# Altium PCB PCB_MEZ.PcbDoc
Units mm, origin at the board's own origin, x right, y up, seen from the top; angles counter-clockwise.
Board outline 77.5 x 123 mm, 2 copper layers (Top Layer, Bottom Layer); 9 components, 87 nets, 356 pads, 0 vias.
Unrouted connection lines stored in the file: 6.
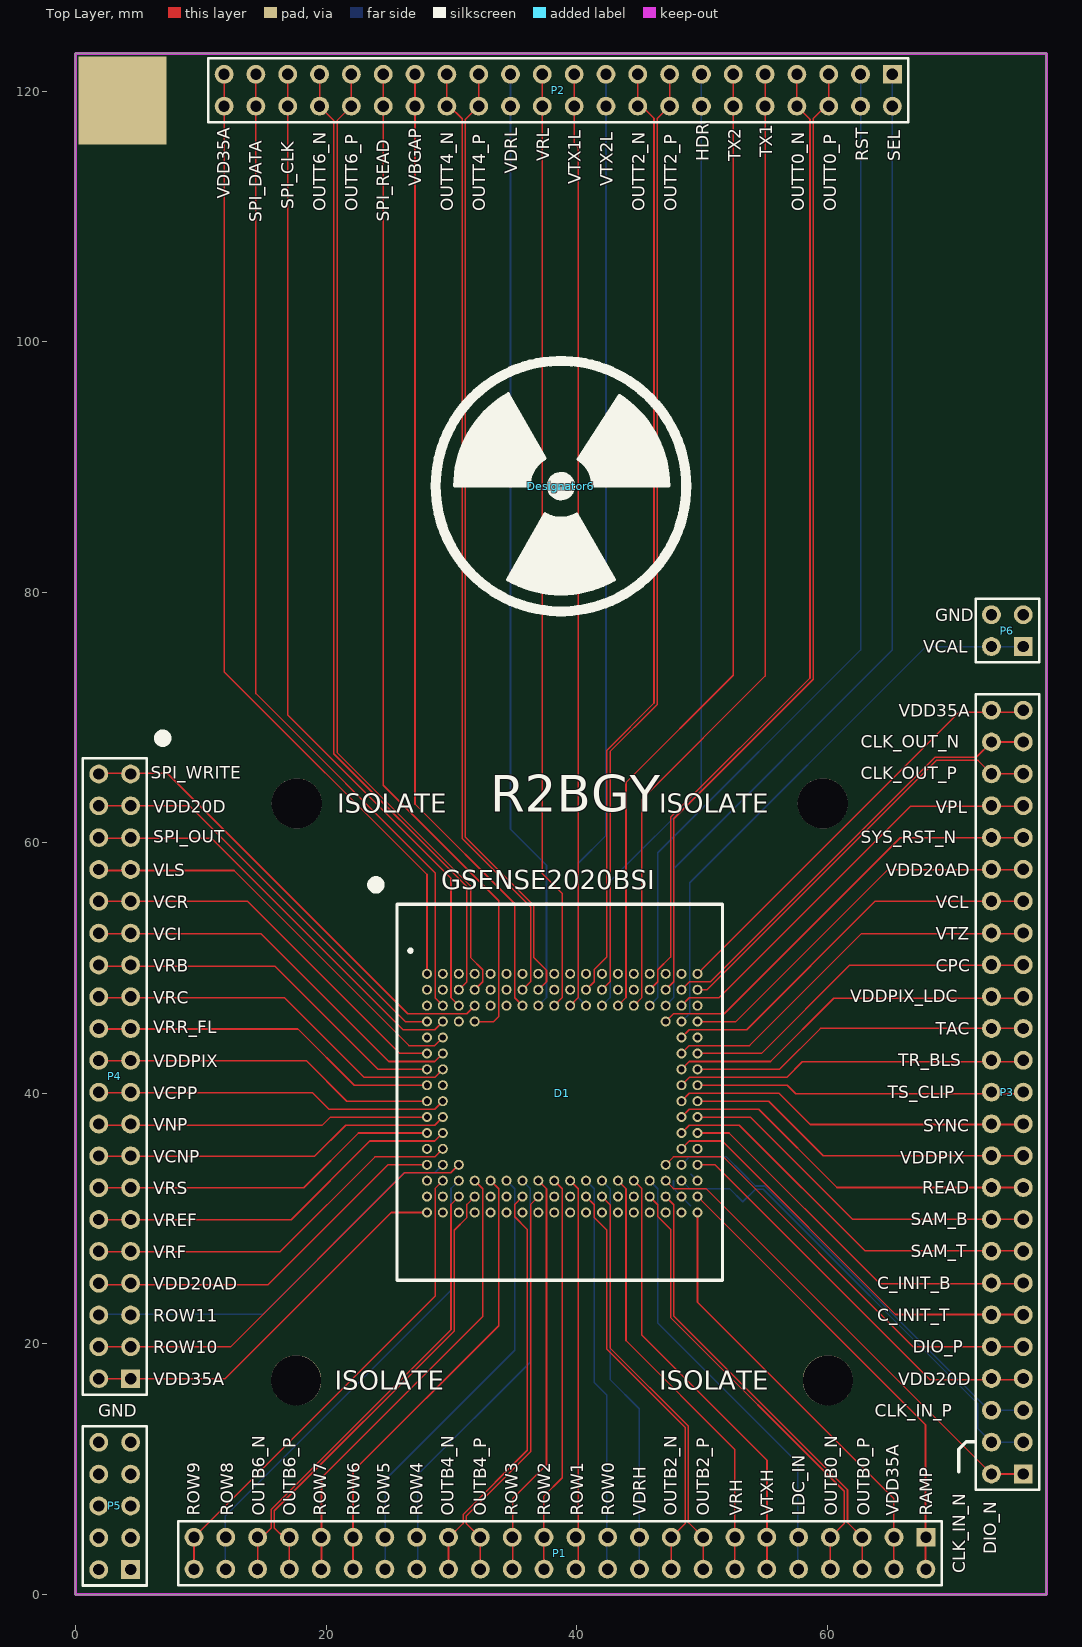
[diagram p0: Top Layer view]
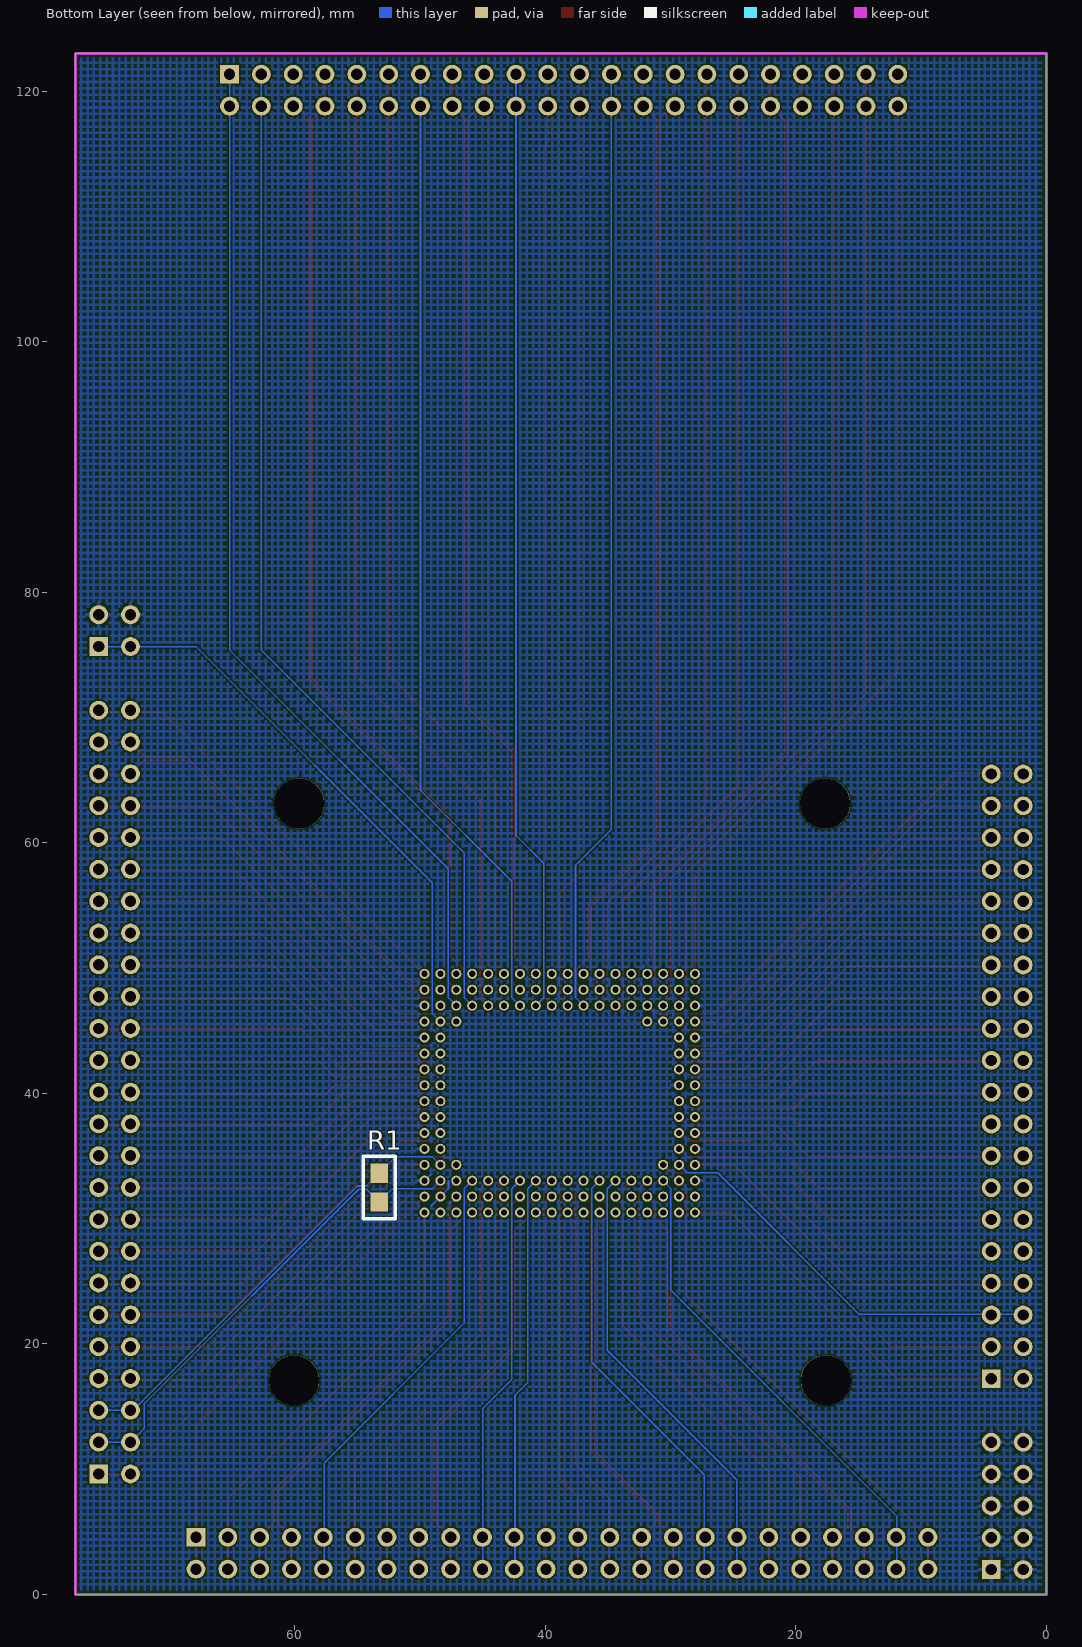
[diagram p1: Bottom Layer view, seen from below]

## Layer stack, top to bottom
Top Solder: solder mask 0.0102, Solder Resist, Dk 3.5
Top Layer: signal copper 0.0356
Dielectric 1: dielectric 0.32, FR-4, Dk 4.8
Bottom Layer: signal copper 0.0356
Bottom Solder: solder mask 0.0102, Solder Resist, Dk 3.5

## Board outline
0,0 77.5,0 77.5,123 0,123

## Design rules (kind name [scope] priority, off if disabled: settings)
Clearance [All] p1: gap=0.125
DiffPairsRouting [All] p1: maxlimit=0.254 minlimit=0.127 mostfreqgap=0.127 toplayer_minwidth=0.127 toplayer_maxwidth=0.381 toplayer_prefwidth=0.127 bottomlayer_minwidth=0.127 bottomlayer_maxwidth=0.381 bottomlayer_prefwidth=0.127 maxuncoupledlength=12.7
PolygonConnect [All] p1: connectstyle=Relief reliefconductorwidth=0.254 reliefentries=4 polygonreliefangle="90 Angle" airgapwidth=0.254
RoutingVias [All] p1: holewidth=0.711 width=1.27 viastyle="Through Hole" minholewidth=0.711 minwidth=1.27 maxholewidth=0.711 maxwidth=1.27
SolderMaskExpansion [All] p1: expansion=0.102
Width [All] p1: maxlimit=0.254 minlimit=0.127 preferedwidth=0.127
28 further rules are at their usual default settings.

## Classes and differential pairs
component class Sheet_MEZ: D1 P1 P2 P3 P4 P5 P6 R1
differential pair CLK_IN: +CLK_IN_P -CLK_IN_N
differential pair CLK_OUT: +CLK_OUT_P -CLK_OUT_N
differential pair OUTB0: +OUTB0_P -OUTB0_N
differential pair OUTB2: +OUTB2_P -OUTB2_N
differential pair OUTB4: +OUTB4_P -OUTB4_N
differential pair OUTB6: +OUTB6_P -OUTB6_N
differential pair OUTT0: +OUTT0_P -OUTT0_N
differential pair OUTT2: +OUTT2_P -OUTT2_N
differential pair OUTT4: +OUTT4_P -OUTT4_N
differential pair OUTT6: +OUTT6_P -OUTT6_N

## Components (designator, comment, footprint, x,y, rotation, side; value= is the part's Value field where it differs from the comment)
D1 "GSENSE2020BSI" GSENSE2020BSI 28.054,49.54 r0 top
Designator6 "Comment" RADIATION 38.75,88.468 r0 top
P1 "Header 24X2" HDR2X24 67.877,4.568 r180 top
P2 "Header 22X2" HDR2X22 65.202,121.336 r180 top
P3 "Header 25X2" HDR2X25 75.649,9.622 r90 top
P4 "Header 20X2" HDR2X20 4.402,17.23 r90 top
P5 "Header 5X2" HDR2X5 4.402,1.99 r90 top
P6 "Header 2X2" HDR2X2 75.649,75.662 r90 top
R1 "100" RES 54.5,30 r180 bottom

## Footprints (in the part's own frame and the unit in brackets; to place one, negate y for a bottom-side part, rotate by r counter-clockwise, add the part's x,y. Pads: shape width x height; smd on the part's side, far side on the other; paste and mask are expansions set on the pad)
GSENSE2020BSI [mm]
  round 0.8 hole 0.5: A1(0,0) A2(1.27,0) A3(2.54,0) A4(3.81,0) A5(5.08,0) A6(6.35,0) A7(7.62,0) A8(8.89,0) A9(10.16,0) A10(11.43,0) A11(12.7,0) A12(13.97,0) A13(15.24,0) A14(16.51,0) A15(17.78,0) A16(19.05,0) A17(20.32,0) A18(21.59,0) B1(0,-1.27) B2(1.27,-1.27) B3(2.54,-1.27) B4(3.81,-1.27) B5(5.08,-1.27) B6(6.35,-1.27) B7(7.62,-1.27) B8(8.89,-1.27) B9(10.16,-1.27) B10(11.43,-1.27) B11(12.7,-1.27) B12(13.97,-1.27) B13(15.24,-1.27) B14(16.51,-1.27) B15(17.78,-1.27) B16(19.05,-1.27) B17(20.32,-1.27) B18(21.59,-1.27) C1(0,-2.54) C2(1.27,-2.54) C3(2.54,-2.54) C4(3.81,-2.54) C5(5.08,-2.54) C6(6.35,-2.54) C7(7.62,-2.54) C8(8.89,-2.54) C9(10.16,-2.54) C10(11.43,-2.54) C11(12.7,-2.54) C12(13.97,-2.54) C13(15.24,-2.54) C14(16.51,-2.54) C15(17.78,-2.54) C16(19.05,-2.54) C17(20.32,-2.54) C18(21.59,-2.54) D1(0,-3.81) D2(1.27,-3.81) D3(2.54,-3.81) D4(3.81,-3.81) D16(19.05,-3.81) D17(20.32,-3.81) D18(21.59,-3.81) E1(0,-5.08) E2(1.27,-5.08) E17(20.32,-5.08) E18(21.59,-5.08) F1(0,-6.35) F2(1.27,-6.35) F17(20.32,-6.35) F18(21.59,-6.35) G1(0,-7.62) G2(1.27,-7.62) G17(20.32,-7.62) G18(21.59,-7.62) H1(0,-8.89) H2(1.27,-8.89) H17(20.32,-8.89) H18(21.59,-8.89) J1(0,-10.16) J2(1.27,-10.16) J17(20.32,-10.16) J18(21.59,-10.16) K1(0,-11.43) K2(1.27,-11.43) K17(20.32,-11.43) K18(21.59,-11.43) L1(0,-12.7) L2(1.27,-12.7) L17(20.32,-12.7) L18(21.59,-12.7) M1(0,-13.97) M2(1.27,-13.97) M17(20.32,-13.97) M18(21.59,-13.97) N1(0,-15.24) N2(1.27,-15.24) N3(2.54,-15.24) N16(19.05,-15.24) N17(20.32,-15.24) N18(21.59,-15.24) P1(0,-16.51) P2(1.27,-16.51) P3(2.54,-16.51) P4(3.81,-16.51) P5(5.08,-16.51) P6(6.35,-16.51) P7(7.62,-16.51) P8(8.89,-16.51) P9(10.16,-16.51) P10(11.43,-16.51) P11(12.7,-16.51) P12(13.97,-16.51) P13(15.24,-16.51) P14(16.51,-16.51) P15(17.78,-16.51) P16(19.05,-16.51) P17(20.32,-16.51) P18(21.59,-16.51) R1(0,-17.78) R2(1.27,-17.78) R3(2.54,-17.78) R4(3.81,-17.78) R5(5.08,-17.78) R6(6.35,-17.78) R7(7.62,-17.78) R8(8.89,-17.78) R9(10.16,-17.78) R10(11.43,-17.78) R11(12.7,-17.78) R12(13.97,-17.78) R13(15.24,-17.78) R14(16.51,-17.78) R15(17.78,-17.78) R16(19.05,-17.78) R17(20.32,-17.78) R18(21.59,-17.78) T1(0,-19.05) T2(1.27,-19.05) T3(2.54,-19.05) T4(3.81,-19.05) T5(5.08,-19.05) T6(6.35,-19.05) T7(7.62,-19.05) T8(8.89,-19.05) T9(10.16,-19.05) T10(11.43,-19.05) T11(12.7,-19.05) T12(13.97,-19.05) T13(15.24,-19.05) T14(16.51,-19.05) T15(17.78,-19.05) T16(19.05,-19.05) T17(20.32,-19.05) T18(21.59,-19.05)
  silkscreen extent -2.4,-24.45 23.6,5.55
HDR2X2 [mm] "Connector; Header; 2x2 Position"
  rect 1.5x1.5 hole 0.9: 1(0,0)
  round 1.5 hole 0.9: 2(0,2.54) 3(2.54,0) 4(2.54,2.54)
  silkscreen extent -1.27,-1.27 3.81,3.81
HDR2X5 [mm] "Connector; Header; 5x2 Position"
  rect 1.5x1.5 hole 0.9: 1(0,0)
  round 1.5 hole 0.9: 2(0,2.54) 3(2.54,0) 4(2.54,2.54) 5(5.08,0) 6(5.08,2.54) 7(7.62,0) 8(7.62,2.54) 9(10.16,0) 10(10.16,2.54)
  silkscreen extent -1.27,-1.27 11.43,3.81
HDR2X20 [mm] "Connector; Header; 20x2 Position"
  rect 1.5x1.5 hole 0.9: 1(0,0)
  round 1.5 hole 0.9: 2(0,2.54) 3(2.54,0) 4(2.54,2.54) 5(5.08,0) 6(5.08,2.54) 7(7.62,0) 8(7.62,2.54) 9(10.16,0) 10(10.16,2.54) 11(12.7,0) 12(12.7,2.54) 13(15.24,0) 14(15.24,2.54) 15(17.78,0) 16(17.78,2.54) 17(20.32,0) 18(20.32,2.54) 19(22.86,0) 20(22.86,2.54) 21(25.4,0) 22(25.4,2.54) 23(27.94,0) 24(27.94,2.54) 25(30.48,0) 26(30.48,2.54) 27(33.02,0) 28(33.02,2.54) 29(35.56,0) 30(35.56,2.54) 31(38.1,0) 32(38.1,2.54) 33(40.64,0) 34(40.64,2.54) 35(43.18,0) 36(43.18,2.54) 37(45.72,0) 38(45.72,2.54) 39(48.26,0) 40(48.26,2.54)
  silkscreen extent -1.27,-1.27 49.53,3.81
HDR2X22 [mm] "Connector; Header; 22x2 Position"
  rect 1.5x1.5 hole 0.9: 1(0,0)
  round 1.5 hole 0.9: 2(0,2.54) 3(2.54,0) 4(2.54,2.54) 5(5.08,0) 6(5.08,2.54) 7(7.62,0) 8(7.62,2.54) 9(10.16,0) 10(10.16,2.54) 11(12.7,0) 12(12.7,2.54) 13(15.24,0) 14(15.24,2.54) 15(17.78,0) 16(17.78,2.54) 17(20.32,0) 18(20.32,2.54) 19(22.86,0) 20(22.86,2.54) 21(25.4,0) 22(25.4,2.54) 23(27.94,0) 24(27.94,2.54) 25(30.48,0) 26(30.48,2.54) 27(33.02,0) 28(33.02,2.54) 29(35.56,0) 30(35.56,2.54) 31(38.1,0) 32(38.1,2.54) 33(40.64,0) 34(40.64,2.54) 35(43.18,0) 36(43.18,2.54) 37(45.72,0) 38(45.72,2.54) 39(48.26,0) 40(48.26,2.54) 41(50.8,0) 42(50.8,2.54) 43(53.34,0) 44(53.34,2.54)
  silkscreen extent -1.27,-1.27 54.61,3.81
HDR2X24 [mm] "Connector; Header; 24x2 Position"
  rect 1.5x1.5 hole 0.9: 1(0,0)
  round 1.5 hole 0.9: 2(0,2.54) 3(2.54,0) 4(2.54,2.54) 5(5.08,0) 6(5.08,2.54) 7(7.62,0) 8(7.62,2.54) 9(10.16,0) 10(10.16,2.54) 11(12.7,0) 12(12.7,2.54) 13(15.24,0) 14(15.24,2.54) 15(17.78,0) 16(17.78,2.54) 17(20.32,0) 18(20.32,2.54) 19(22.86,0) 20(22.86,2.54) 21(25.4,0) 22(25.4,2.54) 23(27.94,0) 24(27.94,2.54) 25(30.48,0) 26(30.48,2.54) 27(33.02,0) 28(33.02,2.54) 29(35.56,0) 30(35.56,2.54) 31(38.1,0) 32(38.1,2.54) 33(40.64,0) 34(40.64,2.54) 35(43.18,0) 36(43.18,2.54) 37(45.72,0) 38(45.72,2.54) 39(48.26,0) 40(48.26,2.54) 41(50.8,0) 42(50.8,2.54) 43(53.34,0) 44(53.34,2.54) 45(55.88,0) 46(55.88,2.54) 47(58.42,0) 48(58.42,2.54)
  silkscreen extent -1.27,-1.27 59.69,3.81
HDR2X25 [mm] "Connector; Header; 25x2 Position"
  rect 1.5x1.5 hole 0.9: 1(0,0)
  round 1.5 hole 0.9: 2(0,2.54) 3(2.54,0) 4(2.54,2.54) 5(5.08,0) 6(5.08,2.54) 7(7.62,0) 8(7.62,2.54) 9(10.16,0) 10(10.16,2.54) 11(12.7,0) 12(12.7,2.54) 13(15.24,0) 14(15.24,2.54) 15(17.78,0) 16(17.78,2.54) 17(20.32,0) 18(20.32,2.54) 19(22.86,0) 20(22.86,2.54) 21(25.4,0) 22(25.4,2.54) 23(27.94,0) 24(27.94,2.54) 25(30.48,0) 26(30.48,2.54) 27(33.02,0) 28(33.02,2.54) 29(35.56,0) 30(35.56,2.54) 31(38.1,0) 32(38.1,2.54) 33(40.64,0) 34(40.64,2.54) 35(43.18,0) 36(43.18,2.54) 37(45.72,0) 38(45.72,2.54) 39(48.26,0) 40(48.26,2.54) 41(50.8,0) 42(50.8,2.54) 43(53.34,0) 44(53.34,2.54) 45(55.88,0) 46(55.88,2.54) 47(58.42,0) 48(58.42,2.54) 49(60.96,0) 50(60.96,2.54)
  silkscreen extent -1.27,-1.27 62.23,3.81
RADIATION [mm]
  silkscreen extent -10,-10 10,10
RES [mil] "FROM_MAX"
  rect 55.98x60 smd: 1(49,52.71) 2(49,142.71)
  silkscreen extent -1,0 99,196, body extent 17,19 81,177, height 100

## Part data
P1: "Header, 24-Pin, Dual row"
P2: "Header, 22-Pin, Dual row"
P3: "Header, 25-Pin, Dual row"
P4: "Header, 20-Pin, Dual row"
P5: "Header, 5-Pin, Dual row"
P6: "Header, 2-Pin, Dual row"
R1: library part Res, "Resistor"

## Free pads (board coordinates)
  rect 7x7 smd: 0(3.759,119.253)
  round 4 hole 4: 0(17.61,17.09) 0(17.661,63.14) 0(59.647,63.14) 0(60.053,17.09)

## Nets (pads, with @x,y where several pads share a name; then routed paths per layer and width w, separated by ;. In a path a pad name is that pad's centre, name@x,y a point inside that pad or via, vN(x,y) a via of type N, cw(c..) or ccw(c..) an arc to the next point about the centre after c; other vN are vias at no path point)
C_INIT_B: D1.L18 P3.13 P3.14 | length 31
  Top Layer w0.127: D1.L18 52.162,36.84 64.186,24.816 75.602,24.816 P3.13
C_INIT_T: D1.M17 P3.11 P3.12 | length 33.3
  Top Layer w0.127: D1.M17 48.999,36.195 51.613,36.195 65.456,22.352 75.619,22.352 P3.11
CLK_IN_N: D1.P17 P3.3 P3.4 R1.1 | length 37.9
  Bottom Layer w0.127: D1.P17 49.004,32.4 52.194,32.4 R1.1 54.271,32.355 54.9,32.355 72,15.255 72,13.271 P3.4 P3.3
CLK_IN_P: D1.N17 P3.5 P3.6 R1.2 | length 35.9
  Bottom Layer w0.127: D1.N17 48.999,34.925 51.955,34.925 R1.2 54.271,32.609 55.005,32.609 72.912,14.702 P3.6 P3.5
CLK_OUT_N: D1.B17 P3.47 P3.48 | length 35.5
  Top Layer w0.127: D1.B17 48.999,48.895 50.673,48.895 68.605,66.827 71.894,66.827 P3.48 P3.47
CLK_OUT_P: D1.B18 P3.45 P3.46 | length 34
  Top Layer w0.127: D1.B18 50.407,48.27 68.711,66.573 72.038,66.573 P3.46 P3.45
CPC: D1.F18 P3.33 P3.34 | length 28.9
  Top Layer w0.127: D1.F18 54.747,43.19 61.798,50.241 75.628,50.241 P3.33
DIO_N: D1.P16 P3.1 P3.2 | length 38.5
  Top Layer w0.127: D1.P16 47.734,32.4 50.331,32.4 P3.2 P3.1
  Bottom Layer w0.127: P3.2@72.851,9.622 P3.2
DIO_P: D1.N16 P3.9 P3.10 | length 35.1
  Top Layer w0.127: D1.N16 47.729,34.925 51.714,34.925 66.878,19.761 75.628,19.761 P3.9
GND: D1.C1 D1.C18 D1.E1 D1.E18 D1.H2 D1.M1 D1.M18 D1.P1 D1.P18 D1.R17 P5.1 P5.2 P5.3 P5.4 P5.5 P5.6 P5.7 P5.8 P5.9 P5.10 P6.3 P6.4 | length 3.3
  Bottom Layer w0.127: 47.731,33.03 47.731,32.403 D1.R17 49.094,31.039 ; 49.106,33.56 49.637,33.03 D1.P18
HDR: D1.C12 P2.13 P2.14 | length 77.6
  Bottom Layer w0.127: D1.C12 42.672,47.648 42.672,56.921 49.962,64.211 P2.14 P2.13
LDC_IN: D1.P15 P1.9 P1.10 | length 35.9
  Bottom Layer w0.127: D1.P15 46.482,32.382 46.482,21.666 57.633,10.516 57.633,2.112 P1.10
OUTB0_N: D1.R15 P1.7 P1.8 | length 36.6
  Top Layer w0.127: D1.R15 46.482,31.112 46.482,30.175 47.498,29.159 47.498,22.12 61.366,8.251 61.366,5.678 P1.7 P1.8
OUTB0_P: D1.R16 P1.5 P1.6 | length 36.2
  Top Layer w0.127: D1.R16 47.752,31.112 47.752,22.225 61.62,8.357 61.62,5.744 P1.5 P1.6
OUTB2_N: D1.R11 P1.17 P1.18 | length 33.5
  Top Layer w0.127: D1.R11 41.402,31.112 41.402,30.099 42.418,29.083 42.418,19.58 48.666,13.331 48.666,5.678 P1.17 P1.18
OUTB2_P: D1.R12 P1.15 P1.16 | length 33.1
  Top Layer w0.127: D1.R12 42.672,31.112 42.672,19.685 48.92,13.437 48.92,5.744 P1.15 P1.16
OUTB4_N: D1.R7 P1.31 P1.32 | length 33.1
  Top Layer w0.127: P1.32 P1.31 29.841,4.568 30.937,5.664 30.937,6.375 36.068,11.506 36.068,29.134 35.052,30.15 35.052,31.138 D1.R7
OUTB4_P: D1.R8 P1.29 P1.30 | length 32.6
  Top Layer w0.127: P1.30 P1.29 32.288,4.568 31.191,5.664 31.191,6.27 36.322,11.401 36.322,31.138 D1.R8
OUTB6_N: D1.R3 P1.43 P1.44 | length 36.6
  Top Layer w0.127: P1.44 P1.43 14.88,4.568 15.621,5.309 15.621,6.782 29.972,21.133 29.972,31.138 D1.R3
OUTB6_P: D1.R4 P1.41 P1.42 | length 37.1
  Top Layer w0.127: P1.42 P1.41 16.616,4.568 15.875,5.309 15.875,6.677 30.234,21.035 30.234,29.079 31.242,30.087 31.242,31.138 D1.R4
OUTT0_N: D1.B15 P2.7 P2.8 | length 78.8
  Top Layer w0.127: D1.B15 46.482,48.918 46.482,49.86 47.498,50.876 47.498,62.03 58.623,73.156 58.623,117.754 P2.8 P2.7
OUTT0_P: D1.B16 P2.5 P2.6 | length 78.6
  Top Layer w0.127: D1.B16 47.752,48.918 47.752,61.925 58.877,73.05 58.877,117.805 59.868,118.796 P2.6 P2.5
OUTT2_N: D1.B11 P2.17 P2.18 | length 76
  Top Layer w0.127: D1.B11 41.402,48.918 41.402,49.886 42.418,50.902 42.418,67.39 46.177,71.149 46.177,117.831 45.212,118.796 P2.18 P2.17
OUTT2_P: D1.B12 P2.15 P2.16 | length 75.3
  Top Layer w0.127: D1.B12 42.672,48.918 42.672,67.285 46.431,71.044 46.431,117.805 P2.16 P2.15
OUTT4_N: D1.B7 P2.29 P2.30 | length 76.2
  Top Layer w0.127: P2.29 P2.30 29.845,118.796 30.861,117.78 30.861,60.35 36.322,54.889 36.322,48.918 D1.B7
OUTT4_P: D1.B8 P2.27 P2.28 | length 76.5
  Top Layer w0.127: P2.27 P2.28 31.115,117.729 31.115,60.456 36.576,54.995 36.576,50.851 37.592,49.835 37.592,48.918 D1.B8
OUTT6_N: D1.B3 P2.37 P2.38 | length 78.2
  Top Layer w0.127: P2.37 P2.38 20.625,117.653 20.625,67.107 31.242,56.49 31.242,48.918 D1.B3
OUTT6_P: D1.B4 P2.35 P2.36 | length 78.6
  Top Layer w0.127: P2.35 P2.36 20.879,117.653 20.879,67.212 31.534,56.557 31.534,50.838 32.512,49.86 32.512,48.918 D1.B4
RAMP: D1.R18 P1.1 P1.2 | length 37.3
  Top Layer w0.127: D1.R18 67.843,13.56 67.843,2.061 P1.2
READ: D1.K17 P3.19 P3.20 | length 30.1
  Top Layer w0.127: D1.K17 48.999,38.735 54.534,38.735 60.782,32.487 75.645,32.487 P3.19
ROW0: D1.P11 P1.21 P1.22 | length 31.7
  Bottom Layer w0.127: D1.P11 41.402,32.382 41.402,16.916 42.418,15.9 42.418,2.086 P1.22
ROW1: D1.P10 P1.23 P1.24 | length 31.4
  Top Layer w0.127: D1.P10 40.132,32.382 40.132,2.223 P1.24
ROW2: D1.P9 P1.25 P1.26 | length 31.9
  Top Layer w0.127: P1.26 37.363,2.061 37.363,7.823 38.862,9.322 38.862,32.382 D1.P9
ROW3: D1.P8 P1.27 P1.28 | length 32.4
  Top Layer w0.127: P1.28 34.9,2.071 34.9,7.671 37.592,10.363 37.592,32.382 D1.P8
ROW4: D1.P7 P1.33 P1.34 | length 35
  Bottom Layer w0.127: P1.34 27.305,2.096 27.305,9.55 36.297,18.542 36.297,32.407 D1.P7
ROW5: D1.P6 P1.35 P1.36 | length 35.6
  Bottom Layer w0.127: P1.36 24.714,2.045 24.714,9.169 35.052,19.507 35.052,32.382 D1.P6
ROW6: D1.P5 P1.37 P1.38 | length 36.1
  Top Layer w0.127: P1.38 22.149,2.036 22.149,9.83 33.782,21.463 33.782,32.382 D1.P5
ROW7: D1.P4 P1.39 P1.40 | length 36.6
  Top Layer w0.127: P1.40 19.634,2.045 19.634,9.322 32.512,22.2 32.512,32.382 D1.P4
ROW8: D1.P3 P1.45 P1.46 | length 38.7
  Bottom Layer w0.127: P1.46 11.963,2.061 11.963,6.274 29.972,24.282 29.972,32.408 D1.P3
ROW9: D1.P2 P1.47 P1.48 | length 39.2
  Top Layer w0.127: P1.48 P1.47 28.702,23.813 28.702,32.408 D1.P2
ROW10: D1.N3 P4.3 P4.4 | length 34.8
  Top Layer w0.127: P4.4 1.871,19.761 12.37,19.761 26.264,33.655 29.949,33.655 D1.N3
ROW11: D1.N2 P4.5 P4.6 | length 32.4
  Bottom Layer w0.127: P4.6 1.93,22.377 14.961,22.377 26.238,33.655 28.679,33.655 D1.N2
RST: D1.C15 P2.3 P2.4 | length 81.3
  Bottom Layer w0.127: D1.C15 46.482,47.648 46.482,59.208 62.662,75.388 P2.4 P2.3
SAM_B: D1.K18 P3.17 P3.18 | length 29.4
  Top Layer w0.127: D1.K18 53.864,38.11 62.027,29.947 75.645,29.947 P3.17
SAM_T: D1.L17 P3.15 P3.16 | length 31.7
  Top Layer w0.127: D1.L17 48.999,37.465 52.984,37.465 63.017,27.432 75.619,27.432 P3.15
SEL: D1.C16 P2.1 P2.2 | length 81.8
  Bottom Layer w0.127: D1.C16 47.752,47.648 47.752,57.938 65.202,75.388 P2.2 P2.1
SPI_CLK: D1.C3 P2.39 P2.40 | length 80
  Top Layer w0.127: P2.39 P2.40 16.942,70.206 29.972,57.175 29.972,47.622 D1.C3
SPI_DATA: D1.C2 P2.41 P2.42 | length 80.5
  Top Layer w0.127: P2.41 P2.42 14.402,71.907 28.702,57.607 28.702,47.622 D1.C2
SPI_OUT: D1.D2 P4.35 P4.36 | length 34.1
  Top Layer w0.127: P4.36 1.904,60.367 10.854,60.367 26.137,45.085 28.679,45.085 D1.D2
SPI_READ: D1.D4 P2.33 P2.34 | length 81.1
  Top Layer w0.127: P2.33 P2.34 24.562,64.592 33.782,55.372 33.782,46.126 33.385,45.73 D1.D4
SPI_WRITE: D1.C4 P4.39 P4.40 | length 38.3
  Top Layer w0.127: P4.40 1.93,65.557 7.315,65.557 26.518,46.355 31.219,46.355 D1.C4
SYNC: D1.J17 P3.23 P3.24 | length 28.6
  Top Layer w0.127: D1.J17 48.999,40.005 56.159,40.005 58.649,37.516 75.602,37.516 P3.23
SYS_RST_N: D1.D16 P3.41 P3.42 | length 34.6
  Top Layer w0.127: D1.D16 47.729,46.355 51.791,46.355 65.837,60.401 75.628,60.401 P3.41
TAC: D1.G18 P3.29 P3.30 | length 27.4
  Top Layer w0.127: D1.G18 56.194,41.92 59.461,45.187 75.645,45.187 P3.29
TR_BLS: D1.H17 P3.27 P3.28 | length 28.1
  Top Layer w0.127: D1.H17 48.999,41.275 56.769,41.275 58.014,42.52 75.526,42.52 P3.27
TS_CLIP: D1.H18 P3.25 P3.26 | length 26.3
  Top Layer w0.127: D1.H18 56.81,40.65 57.48,39.98 75.526,39.98 P3.25
TX1: D1.C14 P2.9 P2.10 | length 78.7
  Top Layer w0.127: D1.C14 45.212,47.648 45.212,63.475 55.042,73.304 P2.9
TX2: D1.C13 P2.11 P2.12 | length 78.2
  Top Layer w0.127: D1.C13 43.942,47.648 43.942,64.821 52.502,73.381 P2.11
VBGAP: D1.C7 P2.31 P2.32 | length 77.9
  Top Layer w0.127: P2.31 P2.32 27.102,63.094 35.052,55.143 35.052,47.622 D1.C7
VCAL: D1.D17 P6.1 P6.2 | length 45.8
  Bottom Layer w0.127: D1.D17 49.022,46.378 49.022,56.808 67.877,75.662 P6.2 P6.1
VCI: D1.F2 P4.29 P4.30 | length 32
  Top Layer w0.127: P4.30 1.896,52.756 14.783,52.756 24.994,42.545 28.679,42.545 D1.F2
VCL: D1.E17 P3.37 P3.38 | length 31.8
  Top Layer w0.127: D1.E17 48.999,45.085 53.569,45.085 63.805,55.321 75.628,55.321 P3.37
VCNP: D1.K2 P4.15 P4.16 | length 28.8
  Top Layer w0.127: P4.16 1.896,34.976 19.075,34.976 21.565,37.465 28.679,37.465 D1.K2
VCPP: D1.J2 P4.19 P4.20 | length 28.3
  Top Layer w0.127: P4.20 1.896,40.056 18.923,40.056 20.244,38.735 28.679,38.735 D1.J2
VCR: D1.F1 P4.31 P4.32 | length 31.2
  Top Layer w0.127: P4.32 1.879,55.347 13.716,55.347 25.873,43.19 D1.F1
VDD20AD: D1.D18 D1.N1 P3.39 P3.40 P4.7 P4.8 | length 61.3
  Top Layer w0.127: P4.8 1.998,24.714 15.367,24.714 24.952,34.3 D1.N1 ; D1.D18 52.715,45.73 64.821,57.836 75.602,57.836 P3.39
VDD20D: D1.D1 D1.N18 P3.7 P3.8 P4.37 P4.38 | length 66.5
  Top Layer w0.127: P4.38 1.871,62.941 9.119,62.941 26.33,45.73 D1.D1 ; D1.N18 51.044,34.3 68.199,17.145 75.552,17.145 P3.7
VDD35A: D1.A1 D1.A18 D1.T1 D1.T18 P1.3 P1.4 P2.43 P2.44 P3.49 P3.50 P4.1 P4.2 | length 179.9
  Top Layer w0.127: P4.2 1.871,17.221 11.938,17.221 25.206,30.49 D1.T1 ; P2.43 P2.44 11.862,73.66 28.054,57.468 D1.A1 ; D1.T18 49.644,23.33 65.303,7.671 65.303,2.061 P1.4 ; D1.A18 70.538,70.434 75.501,70.434 P3.49
VDDPIX: D1.J1 D1.J18 P3.21 P3.22 P4.21 P4.22 | length 55.3
  Top Layer w0.127: P4.22 1.896,42.596 18.44,42.596 21.656,39.38 D1.J1 ; D1.J18 55.337,39.38 59.69,35.027 75.645,35.027 P3.21
VDDPIX_LDC: D1.G17 P3.31 P3.32 | length 29.7
  Top Layer w0.127: D1.G17 48.999,42.545 55.474,42.545 60.528,47.6 75.526,47.6 P3.31
VDRH: D1.P12 P1.19 P1.20 | length 32.2
  Bottom Layer w0.127: D1.P12 42.672,32.382 42.672,17.17 45.009,14.834 45.009,2.036 P1.20
VDRL: D1.C8 P2.25 P2.26 | length 75.8
  Bottom Layer w0.127: P2.25 P2.26 34.722,61.087 37.592,58.217 37.592,47.648 D1.C8
VLS: D1.E2 P4.33 P4.34 | length 33.6
  Top Layer w0.127: P4.34 1.947,57.785 12.649,57.785 26.619,43.815 28.679,43.815 D1.E2
VNP: D1.K1 P4.17 P4.18 | length 26.5
  Top Layer w0.127: P4.18 1.972,37.44 19.685,37.44 20.355,38.11 D1.K1
VPL: D1.C17 P3.43 P3.44 | length 33.9
  Top Layer w0.127: D1.C17 48.999,47.625 51.359,47.625 66.65,62.916 75.602,62.916 P3.43
VRB: D1.G1 P4.27 P4.28 | length 29.6
  Top Layer w0.127: P4.28 1.972,50.14 15.926,50.14 24.146,41.92 D1.G1
VRC: D1.G2 P4.25 P4.26 | length 30.4
  Top Layer w0.127: P4.26 1.947,47.625 16.688,47.625 23.038,41.275 28.679,41.275 D1.G2
VREF: D1.L2 P4.11 P4.12 | length 30.3
  Top Layer w0.127: P4.12 1.871,29.921 17.221,29.921 23.495,36.195 28.679,36.195 D1.L2
VRF: D1.M2 P4.9 P4.10 | length 30.9
  Top Layer w0.127: P4.10 1.896,27.356 16.332,27.356 23.901,34.925 28.679,34.925 D1.M2
VRH: D1.P13 P1.13 P1.14 | length 34.9
  Top Layer w0.127: D1.P13 43.942,32.382 43.942,20.269 52.629,11.582 52.629,2.036 P1.14
VRL: D1.C9 P2.23 P2.24 | length 75.3
  Top Layer w0.127: P2.23 P2.24 37.262,57.556 38.862,55.956 38.862,47.648 D1.C9
VRR_FL: D1.H1 P4.23 P4.24 | length 28.1
  Top Layer w0.127: P4.24 1.896,45.136 17.755,45.136 22.241,40.65 D1.H1
VRS: D1.L1 P4.13 P4.14 | length 28
  Top Layer w0.127: P4.14 1.871,32.461 18.212,32.461 22.59,36.84 D1.L1
VTX1L: D1.C10 P2.21 P2.22 | length 74.7
  Top Layer w0.127: D1.C10 40.132,47.648 40.132,115.519 39.802,115.849 P2.22 P2.21
VTX2L: D1.C11 P2.19 P2.20 | length 75.5
  Bottom Layer w0.127: D1.C11 40.132,47.622 40.132,58.369 42.342,60.579 P2.20 P2.19
VTXH: D1.P14 P1.11 P1.12 | length 35.4
  Top Layer w0.127: D1.P14 45.212,32.382 45.212,20.701 55.194,10.719 55.194,2.045 P1.12
VTZ: D1.F17 P3.35 P3.36 | length 31.3
  Top Layer w0.127: D1.F17 48.999,43.815 53.797,43.815 62.738,52.756 75.602,52.756 P3.35
pads on no net: D1.A2 D1.A3 D1.A4 D1.A5 D1.A6 D1.A7 D1.A8 D1.A9 D1.A10 D1.A11 D1.A12 D1.A13 D1.A14 D1.A15 D1.A16 D1.A17 D1.B1 D1.B2 D1.B5 D1.B6 D1.B9 D1.B10 D1.B13 D1.B14 D1.C5 D1.C6 D1.D3 D1.R1 D1.R2 D1.R5 D1.R6 D1.R9 D1.R10 D1.R13 D1.R14 D1.T2 D1.T3 D1.T4 D1.T5 D1.T6 D1.T7 D1.T8 D1.T9 D1.T10 D1.T11 D1.T12 D1.T13 D1.T14 D1.T15 D1.T16 D1.T17

## Polygon pours and split planes (outlines as drawn)
GND on Bottom Layer "Top Overlay-No Net" (hatched 90Degree grid 0.508 track 0.203, remove dead copper, pour order 3): 0.425,0.375 0.425,122.625 77.125,122.625 77.125,0.375

## Keep-outs
Keep-Out Layer:
  the board outline again, w0.254

## Other copper
Bottom Layer:
  pour cut-out: 48.768,32.258 49.403,32.258 49.454,32.207 49.454,31.699 48.793,31.699 48.768,31.725

## Silkscreen, mask and mechanical layers (free items; w line width, h text height)
Top Overlay:
  circle w0.7: c6.96,68.351 r0.345
  circle w0.7: c23.978,56.642 r0.345
  lines w0.254: 70.5,9.8 70.5,11.6 71.1,12.2 71.7,12.2
  text "TX1" at 55.633,114.722 h1 r90
  text "VRL" at 37.8,114.389 h1 r90
  text "HDR" at 50.538,114.389 h1 r90
  text "TX2" at 53.086,114.389 h1 r90
  text "RST" at 63.276,114.389 h1 r90
  text "SEL" at 65.824,114.389 h1 r90
  text "VDRL" at 35.252,113.389 h1 r90
  text "VTX1L" at 40.348,112.556 h1 r90
  text "VBGAP" at 27.61,112.39 h1 r90
  text "VTX2L" at 42.895,112.39 h1 r90
  text "VDD35A" at 12.324,111.39 h1 r90
  text "SPI_CLK" at 17.419,110.557 h1 r90
  text "OUTT6_N" at 19.967,110.39 h1 r90
  text "OUTT6_P" at 22.514,110.39 h1 r90
  text "OUTT4_N" at 30.157,110.39 h1 r90
  text "OUTT4_P" at 32.705,110.39 h1 r90
  text "OUTT2_N" at 45.443,110.39 h1 r90
  text "OUTT2_P" at 47.99,110.39 h1 r90
  text "OUTT0_N" at 58.181,110.39 h1 r90
  text "OUTT0_P" at 60.729,110.39 h1 r90
  text "SPI_READ" at 25.062,109.557 h1 r90
  text "SPI_DATA" at 14.884,109.525 h1 r90
  text "GND" at 68.613,77.694 h1
  text "VCAL" at 67.648,75.18 h1
  text "VDD35A" at 65.71,70.079 h1
  text "CLK_OUT_N" at 62.666,67.6 h1
  text "SPI_WRITE" at 6,65.1 h1
  text "CLK_OUT_P" at 62.666,65.057 h1
  text "VDD20D" at 6.2,62.395 h1
  text "ISOLATE" at 20.9,62.4 h1.52
  text "ISOLATE" at 46.6,62.4 h1.52
  text "VPL" at 68.665,62.348 h1
  text "R2BGY" at 33.088,61.533 h5
  text "SPI_OUT" at 6.2,60.023 h1
  text "SYS_RST_N" at 62.666,59.971 h1
  text "VDD20AD" at 64.666,57.338 h1
  text "VLS" at 6.2,57.318 h1
  text "VCR" at 6.2,54.779 h1
  text "VCL" at 68.656,54.788 h1
  text "VCI" at 6.2,52.24 h1
  text "VTZ" at 68.656,52.248 h1
  text "VRB" at 6.2,49.702 h1
  text "CPC" at 68.656,49.708 h1
  text "VDDPIX_LDC" at 61.833,47.257 h1
  text "VRC" at 6.2,47.163 h1
  text "VRR_FL" at 6.2,44.791 h1
  text "TAC" at 68.656,44.679 h1
  text "TR_BLS" at 65.665,42.171 h1
  text "VDDPIX" at 6.2,42.086 h1
  text "TS_CLIP" at 64.832,39.629 h1
  text "VCPP" at 6.2,39.547 h1
  text "VNP" at 6.2,37.009 h1
  text "SYNC" at 67.665,36.919 h1
  text "VCNP" at 6.2,34.47 h1
  text "VDDPIX" at 65.832,34.376 h1
  text "READ" at 67.6,32 h1
  text "VRS" at 6.2,31.932 h1
  text "SAM_B" at 66.665,29.457 h1
  text "VREF" at 6.2,29.393 h1
  text "SAM_T" at 66.665,26.914 h1
  text "VRF" at 6.2,26.854 h1
  text "C_INIT_B" at 63.999,24.371 h1
  text "VDD20AD" at 6.2,24.316 h1
  text "C_INIT_T" at 63.999,21.829 h1
  text "ROW11" at 6.2,21.777 h1
  text "DIO_P" at 66.832,19.286 h1
  text "ROW10" at 6.2,19.239 h1
  text "VDD35A" at 6.2,16.7 h1
  text "VDD20D" at 65.659,16.688 h1
  text "ISOLATE" at 20.7,16.328 h1.52
  text "ISOLATE" at 46.6,16.328 h1.52
  text "GND" at 1.8,14.2 h1
  text "CLK_IN_P" at 63.8,14.2 h1
  text "ROW9" at 9.9,6.3 h1 r90
  text "ROW8" at 12.6,6.3 h1 r90
  text "OUTB6_N" at 15.1,6.3 h1 r90
  text "OUTB6_P" at 17.6,6.3 h1 r90
  text "ROW7" at 20.034,6.3 h1 r90
  text "ROW6" at 22.7,6.3 h1 r90
  text "ROW5" at 25.1,6.3 h1 r90
  text "ROW4" at 27.7,6.3 h1 r90
  text "OUTB4_N" at 30.2,6.3 h1 r90
  text "OUTB4_P" at 32.8,6.3 h1 r90
  text "ROW3" at 35.3,6.3 h1 r90
  text "ROW2" at 37.9,6.3 h1 r90
  text "ROW1" at 40.532,6.3 h1 r90
  text "ROW0" at 43,6.3 h1 r90
  text "VDRH" at 45.5,6.3 h1 r90
  text "OUTB2_N" at 48,6.3 h1 r90
  text "OUTB2_P" at 50.6,6.3 h1 r90
  text "VRH" at 53.2,6.3 h1 r90
  text "VTXH" at 55.7,6.3 h1 r90
  text "LDC_IN" at 58.2,6.3 h1 r90
  text "OUTB0_N" at 60.8,6.3 h1 r90
  text "OUTB0_P" at 63.4,6.3 h1 r90
  text "VDD35A" at 65.703,6.3 h1 r90
  text "RAMP" at 68.4,6.3 h1 r90
  text "DIO_N" at 73.5,3.2 h1 r90
  text "CLK_IN_N" at 71,1.7 h1 r90